# EAGLE board breakout board (EAGLE 9.2.2)
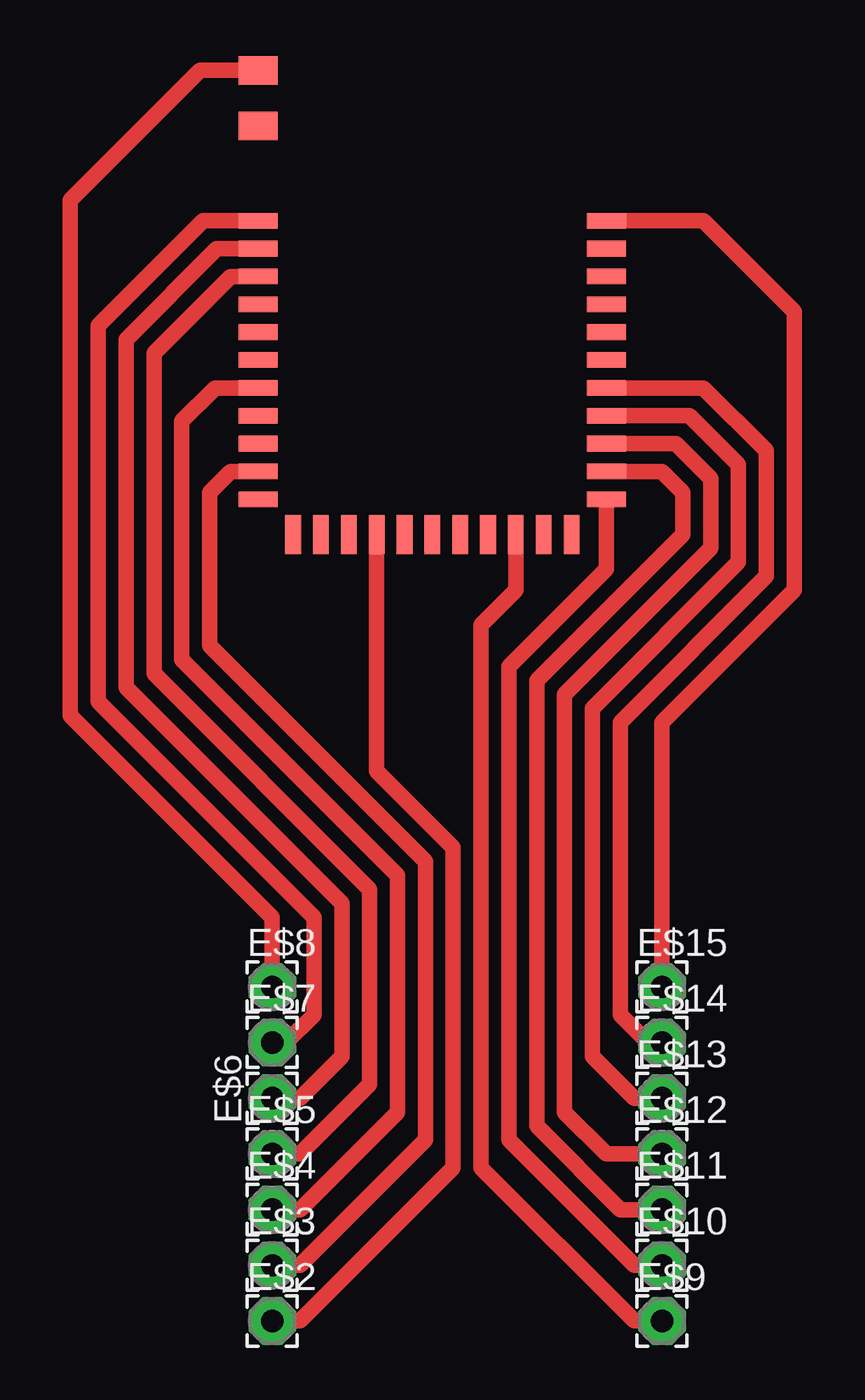
[diagram p0: board, top side]

No outline drawn. Coordinates in mm, seen from the top.
Copper layers (1*16): Top 0.035mm / dielectric 1.5mm / Bottom 0.035mm
Design rules "default": minimum track width 6mil, minimum drill 0.35mm, track to track 6mil, track to pad 6mil, pad to pad 6mil, via to via 6mil, smd to smd 6mil, copper to edge 40mil, drill to drill 6mil, minimum pad ring 10mil, minimum via ring 8mil, stop-mask expansion 4mil, vias tented up to drill 0mil, thermal gap 10mil

## Footprints (pad centres in the part's own frame; a part is rotated, then mirrored left to right if it is on the bottom)
WIRELESS-CAS = smd 1.295 x 1.778: 1 21.158,14.3; 2 18.618,14.3 | smd 0.711 x 1.778: 3 14.3,14.3; 4 13.03,14.3; 5 11.76,14.3; 6 10.49,14.3; 7 9.22,14.3; 8 7.95,14.3; 9 6.68,14.3; 10 5.41,14.3; 11 4.14,14.3; 12 2.87,14.3; 13 1.6,14.3; 25 1.6,-1.6; 26 2.87,-1.6; 27 4.14,-1.6; 28 5.41,-1.6; 29 6.68,-1.6; 30 7.95,-1.6; 31 9.22,-1.6; 32 10.49,-1.6; 33 11.76,-1.6; 34 13.03,-1.6; 35 14.3,-1.6 | smd 1.778 x 0.711: 14 0,12.7; 15 0,11.43; 16 0,10.16; 17 0,8.89; 18 0,7.62; 19 0,6.35; 20 0,5.08; 21 0,3.81; 22 0,2.54; 23 0,1.27; 24 0,0
2,15/1,0 = drill 1.016 pad 2.159 octagon: 1 0,0

## Placement (x,y rotation side)
E$1  [WIRELESS-CAS]  24.77,37.78 90 top
E$2  [2,15/1,0]  11.11,1.91 0 top
E$3  [2,15/1,0]  11.11,4.45 0 top
E$4  [2,15/1,0]  11.11,6.99 0 top
E$5  [2,15/1,0]  11.11,9.53 0 top
E$6  [2,15/1,0]  11.11,12.06 90 top
E$7  [2,15/1,0]  11.11,14.61 0 top
E$8  [2,15/1,0]  11.11,17.14 0 top
E$9  [2,15/1,0]  28.89,1.91 0 top
E$10  [2,15/1,0]  28.89,4.45 0 top
E$11  [2,15/1,0]  28.89,6.99 0 top
E$12  [2,15/1,0]  28.89,9.53 0 top
E$13  [2,15/1,0]  28.89,12.06 0 top
E$14  [2,15/1,0]  28.89,14.61 0 top
E$15  [2,15/1,0]  28.89,17.14 0 top

## Library data of the parts
E$1 = my library
E$2-E$15 = wirepad

## Nets
S$1: E$1.1 E$8.1
S$2: E$1.3 E$7.1
S$3: E$1.4 E$6.1
S$4: E$1.5 E$5.1
S$6: E$1.9 E$4.1
S$7: E$1.17 E$2.1
S$8: E$1.22 E$9.1
S$9: E$1.25 E$10.1
S$10: E$1.26 E$11.1
S$11: E$1.27 E$12.1
S$12: E$1.28 E$13.1
S$13: E$1.29 E$14.1
S$14: E$1.35 E$15.1
S$15: E$1.12 E$3.1

## Tracks (layer width: path | path; a pad name or v marks a point on that pad's centre or on a via)
S$1
  Top 0.711: E$8.1 11.11,20.32 1.91,29.53 1.91,53.02 7.82,58.94 E$1.1
S$2
  Top 0.711: E$7.1 11.75,14.61 13.02,15.88 13.02,20.32 3.17,30.16 3.17,47.31 7.95,52.08 E$1.3
S$3
  Top 0.711: E$6.1 12.38,12.06 14.29,13.97 14.29,20.95 4.45,30.8 4.45,46.67 8.59,50.81 E$1.4
S$4
  Top 0.711: E$5.1 12.38,9.53 15.56,12.7 15.56,21.59 5.71,31.43 5.71,46.04 9.22,49.54 E$1.5
S$6
  Top 0.711: E$4.1 12.38,6.99 16.83,11.43 16.83,22.23 6.99,32.07 6.99,42.95 8.5,44.46 E$1.9
S$7
  Top 0.711: E$2.1 12.38,1.91 19.37,8.89 19.37,23.5 15.88,26.99 E$1.17
S$8
  Top 0.711: E$9.1 27.62,1.91 20.64,8.89 20.64,33.66 22.23,35.24 E$1.22
S$9
  Top 0.711: E$10.1 27.62,4.45 21.91,10.16 21.91,31.75 26.36,36.21 E$1.25
S$10
  Top 0.711: E$11.1 26.99,6.99 23.18,10.79 23.18,31.11 29.84,37.78 29.84,39.69 28.88,40.65 E$1.26
S$11
  Top 0.711: E$12.1 26.35,9.53 24.45,11.43 24.45,30.48 31.11,37.15 31.11,40.32 29.52,41.92 E$1.27
S$12
  Top 0.711: E$13.1 27.62,12.06 25.72,13.97 25.72,29.84 32.38,36.51 32.38,40.96 30.15,43.19 E$1.28
S$13
  Top 0.711: E$14.1 28.26,14.61 26.99,15.88 26.99,29.21 33.66,35.88 33.66,41.59 30.79,44.46 E$1.29
S$14
  Top 0.711: E$15.1 28.89,29.21 34.92,35.24 34.92,47.94 30.79,52.08 E$1.35
S$15
  Top 0.711: E$3.1 12.38,4.45 18.1,10.16 18.1,22.86 8.26,32.7 8.26,39.69 9.22,40.65 E$1.12